# Altium PCB powerstrip2.PcbDoc
Units mil, origin at the board's own origin, x right, y up, seen from the top; angles counter-clockwise.
Board outline 910 x 1275 mil, 2 copper layers (Top Layer, Bottom Layer); 6 components, 3 nets, 15 pads, 0 vias.
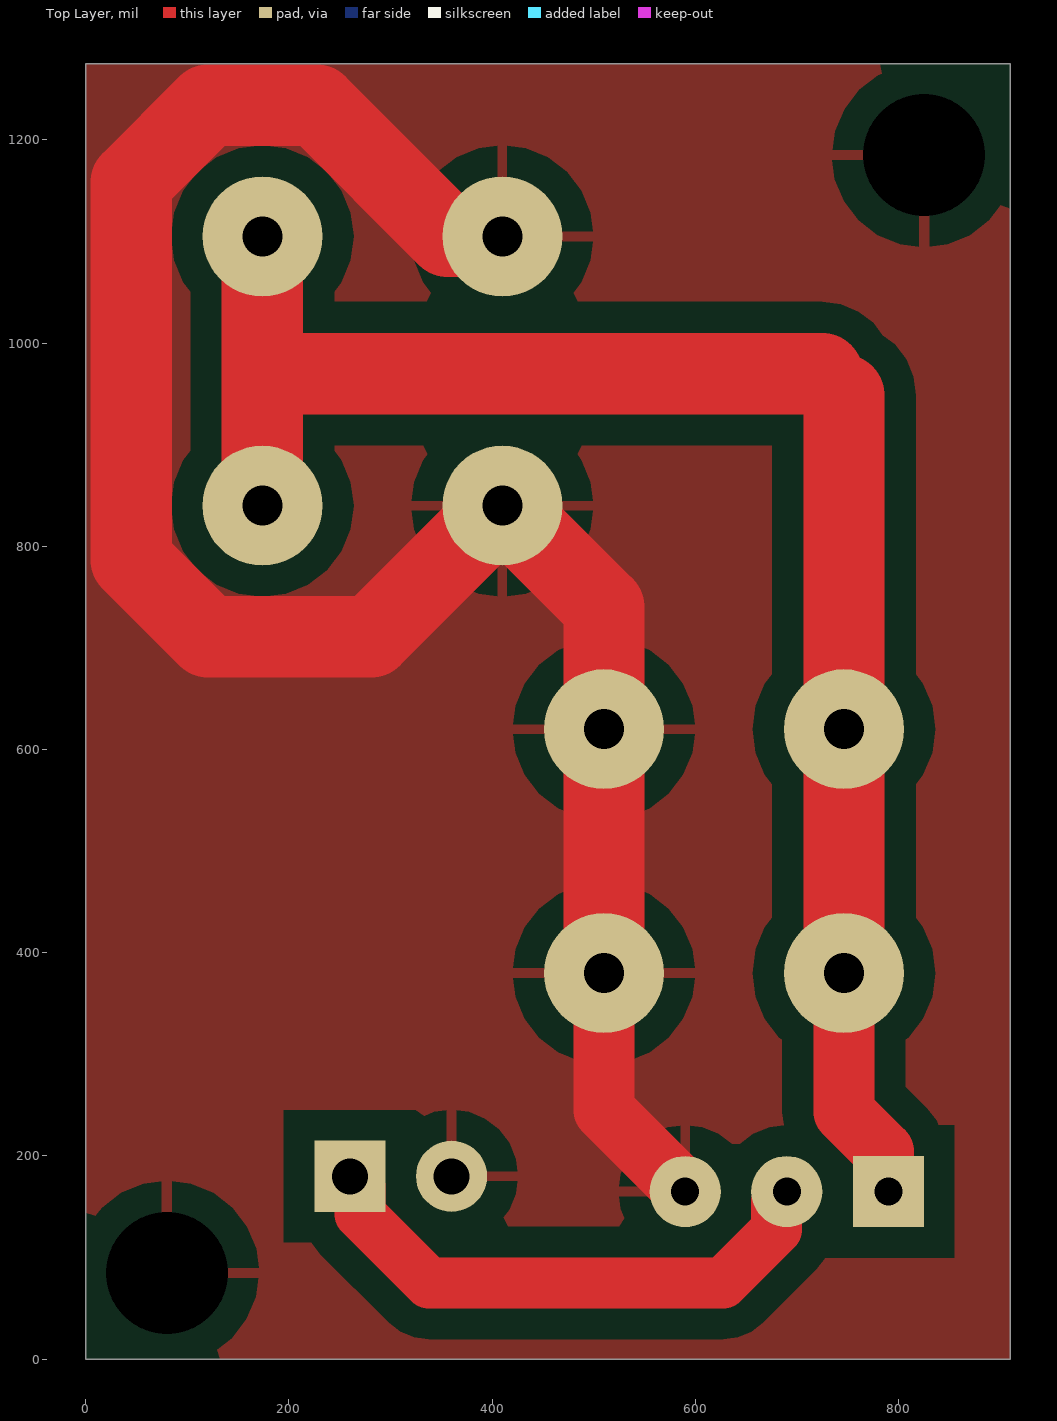
[diagram p0: Top Layer view]
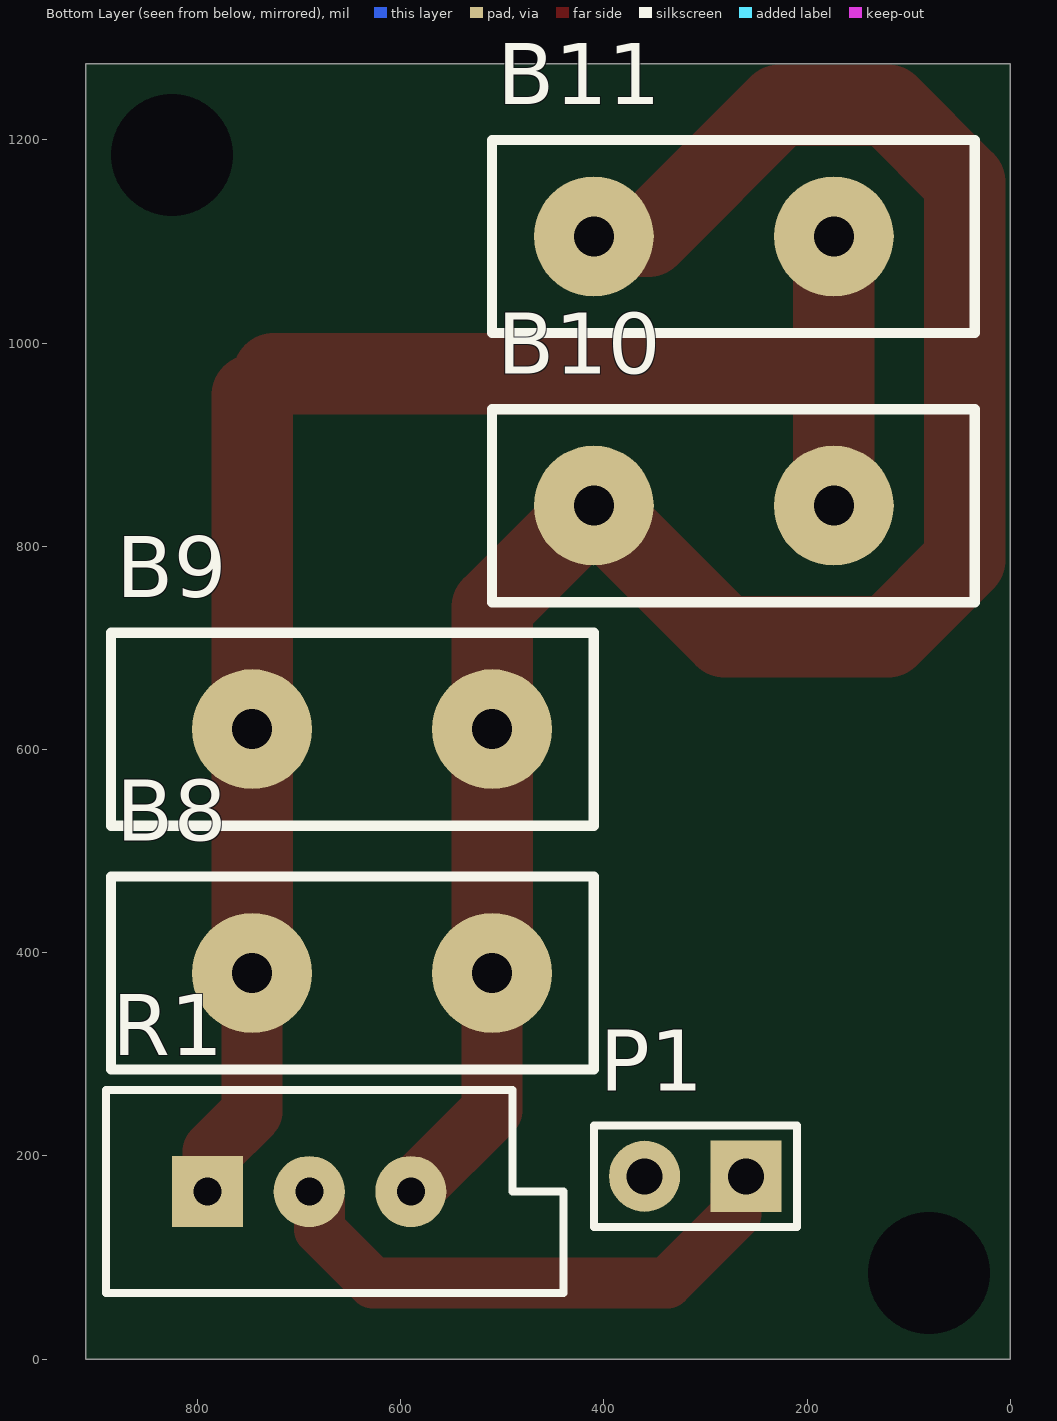
[diagram p1: Bottom Layer view, seen from below]

## Layer stack, top to bottom
Top Layer: signal copper 1.4
Dielectric: dielectric 12.6, FR-4, Dk 4.8
Bottom Layer: signal copper 1.4

## Board outline
0,1275 910,1275 910,0 0,0 0,1275

## Design rules (kind name [scope] priority, off if disabled: settings)
Clearance [All] p1: gap=30
PolygonConnect [All] p1: connectstyle=Relief reliefconductorwidth=10 reliefentries=4 polygonreliefangle="90 Angle"
RoomDefinition powerstrip2 [InComponentClass('powerstrip2')] p1: confinementstyle=ConfineIn formatcopy=TRUE lockcomponents=FALSE outline 0,0 910,0 910,1275 0,1275
RoutingVias [All] p1: holewidth=28 width=50 viastyle="Through Hole" minholewidth=28 minwidth=50 maxholewidth=28 maxwidth=50
SilkscreenOverComponentPads [All] p1: minsilkscreentomaskgap=10
SolderMaskExpansion [All] p1: expansion=4
Width [All] p1: maxlimit=80 minlimit=50 preferedwidth=80
27 further rules are at their usual default settings.

## Components (designator, comment, footprint, x,y, rotation, side; value= is the part's Value field where it differs from the comment)
B8 "Batter_Header" Battery_Header 510,380 r0 bottom
B9 "Batter_Header" Battery_Header 510,620 r0 bottom
B10 "Batter_Header" Battery_Header 410,840 r180 bottom
B11 "Batter_Header" Battery_Header 410,1105 r180 bottom
P1 "Header 2" HDR1X2 260,180 r0 bottom
R1 "RPot" VR5 690,165 r180 bottom

## Footprints (in the part's own frame and the unit in brackets; to place one, negate y for a bottom-side part, rotate by r counter-clockwise, add the part's x,y. Pads: shape width x height; smd on the part's side, far side on the other; paste and mask are expansions set on the pad)
Battery_Header [mm]
  round 3 hole 1: 0(0,0) 1(6,0)
  silkscreen extent -2.54,-2.41 9.53,2.41
HDR1X2 [mil] "Connector; Header; 2 Position"
  rect 70x70 hole 35.43: 1(0,0)
  round 70 hole 35.43: 2(100,0)
  silkscreen extent -50,-50 150,50
VR5 [mil] "Variable Resistor, Thru-Hole; 3 Leads"
  rect 70x70 hole 27.56: 1(-100,0)
  round 70 hole 27.56: 2(0,0) 3(100,0)
  silkscreen extent -200,-100 250,100

## Part data
P1: "Header, 2-Pin"
R1: "Potentiometer"

## Free pads (board coordinates)
  round 0 hole 120: 0(80,85) 1(825,1185)

## Nets (pads, with @x,y where several pads share a name; then routed paths per layer and width w, separated by ;. In a path a pad name is that pad's centre, name@x,y a point inside that pad or via, vN(x,y) a via of type N, cw(c..) or ccw(c..) an arc to the next point about the centre after c; other vN are vias at no path point)
GND: B8.0 B9.0 B10.0 B11.0 P1.2 pad.0 pad.1 R1.3 | length 2021.6
  Top Layer w60: B8.0 510,245 R1.3
  Top Layer w80: B11.0 356.29,1105 227.24,1234.06 120.32,1234.06 44.72,1158.46 44.72,786.54 120.32,710.94 280.94,710.94 B10.0 510,740 B9.0 B8.0
NetP1_1: P1.1 R1.2 | length 542.7
  Top Layer w50: P1.1 270,170 270,142.72 337.72,75 627.28,75 680,127.72 680,155 R1.2
VCC: B8.1 B9.1 B10.1 B11.1 R1.1 | length 1622.8
  Top Layer w60: B8.1 746.22,243.13 785,204.35 785,170 R1.1
  Top Layer w80: B11.1 B10.1 B10.1@185,851.22 ; 185,970 725,970 ; B8.1 B9.1 746.22,948.78

## Polygon pours and split planes (outlines as drawn)
GND on Top Layer "Top Layer-No Net" (solid, remove dead copper, pour order 1000): 0,1275 910,1275 910,0 0,0 0,1275